# EAGLE board CT_schematic (EAGLE 7.6.0)

Size 100 x 80 mm. Coordinates in mm from the lower left corner, seen from the top.
Outline: 0,0 100,0 100,80 0,80 0,0
Copper layers (1*16): Top 0.035mm / dielectric 1.5mm / Bottom 0.035mm
Design rules "default": minimum track width 10mil, minimum drill 24mil, track to track 8mil, track to pad 8mil, pad to pad 8mil, via to via 8mil, smd to smd 8mil, copper to edge 40mil, drill to drill 8mil, minimum pad ring 10mil, minimum via ring 8mil, stop-mask expansion 4mil, vias tented up to drill 0mil, thermal gap 10mil

## Footprints (pad centres in the part's own frame; a part is rotated, then mirrored left to right if it is on the bottom)
C0603 = smd 0.8 x 0.8: 1 -0.762,0; 2 0.762,0
C0805 = smd 1.2 x 1.3: 1 -1.016,0; 2 1.016,0
C0402 = smd 0.5 x 0.5: 1 -0.508,0; 2 0.508,0
C1210 = smd 1.2 x 2.5: 1 -1.524,0; 2 1.524,0
C1206 = smd 1.3 x 1.6: 1 -1.524,0; 2 1.524,0
L0603 = smd 0.8 x 0.8: 1 -0.762,0; 2 0.762,0
R0603 = smd 0.8 x 0.8: 1 -0.762,0; 2 0.762,0
UFQFPN28 = smd 0.559 x 0.305: 1 -2.07,1.5; 7 -2.07,-1.5; 15 2.07,-1.5; 21 2.07,1.5 | smd 0.813 x 0.305: 2 -1.943,1; 3 -1.943,0.5; 4 -1.943,0; 5 -1.943,-0.5; 6 -1.943,-1; 16 1.943,-1; 17 1.943,-0.5; 18 1.943,0; 19 1.943,0.5; 20 1.943,1 | smd 0.305 x 0.559: 8 -1.5,-2.07; 14 1.5,-2.07; 22 1.5,2.07; 28 -1.5,2.07 | smd 0.305 x 0.813: 9 -1,-1.943; 10 -0.5,-1.943; 11 0,-1.943; 12 0.5,-1.943; 13 1,-1.943; 23 1,1.943; 24 0.5,1.943; 25 0,1.943; 26 -0.5,1.943; 27 -1,1.943
ATBTLC1000-MR110CA = smd 2 x 0.5: 1 -7.2,2.7; 2 -7.2,1.8; 3 -7.2,0.9; 4 -7.2,0; 5 -7.2,-0.9; 6 -7.2,-1.8; 7 -7.2,-2.7; 8 -7.2,-3.6; 17 3.6,-3.6; 18 3.6,-2.7; 19 3.6,-1.8; 20 3.6,-0.9; 21 3.6,0; 22 3.6,0.9; 23 3.6,1.8; 24 3.6,2.7 | smd 0.5 x 2: 9 -4.255,-6.824; 10 -3.355,-6.824; 11 -2.455,-6.824; 12 -1.555,-6.824; 13 -0.655,-6.824; 14 0.245,-6.824; 15 1.145,-6.824; 16 2.045,-6.824 | smd 2.7 x 2.7: 25 -1.261,-0.328
ASEK = smd 1.4 x 1: 1 -1.1,-0.8; 2 1.1,-0.8; 3 1.1,0.8; 4 -1.1,0.8
ASFL1 = smd 1.7 x 1.5: 1 -1.27,-1.1; 2 1.27,-1.1; 3 1.27,1.1; 4 -1.27,1.1
SOIC-8_EP = smd 1.6 x 0.533: 1 -2.921,1.905; 2 -2.921,0.635; 3 -2.921,-0.635; 4 -2.921,-1.905; 5 2.921,-1.905; 6 2.921,-0.635; 7 2.921,0.635; 8 2.921,1.905 | smd 2.54 x 3.302: EPAD 0,0 | drill 0.406 pad 0.406: P$1 -0.508,0.635; P$2 0.381,0.635; P$3 -0.508,-0.635; P$4 0.381,-0.635
DFN8_2X3MC = smd 0.813 x 0.305: 1 -1.398,0.75; 2 -1.398,0.25; 3 -1.398,-0.25; 4 -1.398,-0.75; 5 1.398,-0.75; 6 1.398,-0.25; 7 1.398,0.25; 8 1.398,0.75 | smd 1.753 x 1.549: 9 0,0
JST-2-SMD = smd 1 x 4.6: 1 -1,-3.7; 2 1,-3.7 | smd 1.6 x 3.4: NC1 -3.4,1.5; NC2 3.4,1.5
FCI_10118193-0001LF = smd 0.4 x 1.35: 1 -1.3,2.675; 2 -0.65,2.675; 3 0,2.675; 4 0.65,2.675; 5 1.3,2.675 | smd 1.6 x 1.4: 6 -3.2,2.45; 7 3.2,2.45 | smd 1.9 x 1.9: 8 -1.2,0; 9 1.2,0 | hole 0.5: -3.3,0; 3.3,0
SON-6 = smd 0.55 x 0.3: 1 -0.355,0.5 | smd 0.52 x 0.3: 2 -0.37,0; 3 -0.37,-0.5; 4 0.37,-0.5; 5 0.37,0; 6 0.37,0.5
SW_4-1437565-2 = smd 1.4 x 2.1: 1 -2.23,4.55; 2 -2.23,-4.55; 3 2.23,4.55; 4 2.23,-4.55
LGM67K-G1J2-24-Z = smd 0.8 x 1.4: A -2,0; C 0,0
NC7SZ125M5X = smd 1.3 x 0.7: 1 -1.3,0.95; 2 -1.3,0; 3 -1.3,-0.95; 4 1.3,-0.95; 5 1.3,0.95

## Placement (x,y rotation side)
C1  1e-07  [C0603]  -38.1,57.15 0 top  (outside the outline)
C2  1e-07  [C0603]  -41.91,57.15 0 top  (outside the outline)
C3  1e-07  [C0603]  -45.72,57.15 0 top  (outside the outline)
C4  1e-07  [C0603]  -49.53,57.15 0 top  (outside the outline)
C5  4.7e-06  [C0603]  -34.29,57.15 0 top  (outside the outline)
C6  1e-08  [C0603]  -53.34,57.15 0 top  (outside the outline)
C7  1e-06  [C0603]  -57.15,57.15 0 top  (outside the outline)
C8  1e-05  [C0805]  -21.59,52.07 0 top  (outside the outline)
C9  1e-05  [C0805]  -26.67,52.07 0 top  (outside the outline)
C10  1e-08  [C0402]  -38.1,62.23 0 top  (outside the outline)
C11  1e-08  [C0402]  -41.91,62.23 0 top  (outside the outline)
C12  1e-05  [C1210]  -57.15,36.83 0 top  (outside the outline)
C13  1e-05  [C1210]  -16.51,45.72 0 top  (outside the outline)
C14  1e-05  [C1210]  -22.86,45.72 0 top  (outside the outline)
C15  1e-05  [C1210]  -29.21,45.72 0 top  (outside the outline)
C16  1e-07  [C0402]  -45.72,62.23 0 top  (outside the outline)
C17  1e-05  [C1206]  -52.07,44.45 0 top  (outside the outline)
C18  1e-05  [C1206]  -58.42,44.45 0 top  (outside the outline)
C19  1e-08  [C0402]  -49.53,62.23 0 top  (outside the outline)
F1  240.0  [L0603]  -60.96,57.15 0 top  (outside the outline)
R1  10000.0  [R0603]  -50.8,50.8 0 top  (outside the outline)
R2  1000.0  [R0603]  -15.24,62.23 0 top  (outside the outline)
R3  1600.5  [R0603]  -19.05,62.23 0 top  (outside the outline)
R4  4700.0  [R0603]  -22.86,62.23 0 top  (outside the outline)
R5  10000.0  [R0603]  -55.88,50.8 0 top  (outside the outline)
R6  10000.0  [R0603]  -60.96,50.8 0 top  (outside the outline)
R7  10000.0  [R0603]  -15.24,57.15 0 top  (outside the outline)
R8  4031.5447154472  [R0603]  -35.56,50.8 0 top  (outside the outline)
R9  2200.0  [R0603]  -26.67,62.23 0 top  (outside the outline)
R10  10000.0  [R0603]  -20.32,57.15 0 top  (outside the outline)
R11  10000.0  [R0603]  -25.4,57.15 0 top  (outside the outline)
R12  9100.0  [R0603]  -30.48,62.23 0 top  (outside the outline)
R13  680000.0  [R0603]  -40.64,50.8 0 top  (outside the outline)
R14  120000.0  [R0603]  -45.72,50.8 0 top  (outside the outline)
R15  2000.0  [R0603]  -34.29,62.23 0 top  (outside the outline)
R16  10000.0  [R0603]  -30.48,57.15 0 top  (outside the outline)
U1  STM32L011G4U6  [UFQFPN28]  -44.45,45.72 0 top  (outside the outline)
U2  ATBTLC1000-MR110CA  [ATBTLC1000-MR110CA]  -17.78,8.89 0 top  (outside the outline)
U3  ASEK-32.768KHz-ECST  [ASEK]  -29.21,38.1 0 top  (outside the outline)
U4  ASFL1-12MHZ-NCS  [ASFL1]  -41.91,26.67 0 top  (outside the outline)
U5  MIC5234YME  [SOIC-8_EP]  -36.83,36.83 0 top  (outside the outline)
U6  MCP73831T-2ACI/MC  [DFN8_2X3MC]  -58.42,60.96 0 top  (outside the outline)
U7  S2B-PH-SM4-TB(LF)(SN)  [JST-2-SMD]  -22.86,29.21 0 top  (outside the outline)
U8  10118193-0001LF  [FCI_10118193-0001LF]  -50.8,26.67 0 top  (outside the outline)
U9  TPS3895ADRYR  [SON-6]  -52.07,60.96 0 top  (outside the outline)
U10  4-1437565-2  [SW_4-1437565-2]  -49.53,6.35 0 top  (outside the outline)
U11  Q65110A2395  [LGM67K-G1J2-24-Z]  -45.72,36.83 0 top  (outside the outline)
U12  nc7sz125m5x  [NC7SZ125M5X]  -15.24,50.8 0 top  (outside the outline)

## Library data of the parts
C1-C19 F1 R1-R16 U1-U12 = circuit_tree

## Nets
CLK_U1_2: U1.2 U3.3
CLK_U1_6: U1.6 U4.3
GND: C1.2 C2.2 C3.2 C4.2 C5.2 C6.2 C7.2 C8.2 C9.2 C10.2 C11.2 C12.2 C13.2 C14.2 C15.2 C16.2 C17.2 C18.2 C19.2 R2.2 R5.2 R9.2 R12.2 R14.2 R15.2 U1.16 U2.1 U2.9 U2.13 U2.24 U2.25 U3.2 U4.2 U5.7 U5.EPAD U6.6 U6.9 U7.2 U8.5 U8.6 U8.7 U8.8 U8.9 U9.2 U11.C U12.1 U12.3
INPUT_USBPOWER_5V: C17.1 R16.2 U6.1 U6.2 U8.1
NET_U1_1: R5.1 U1.1
NET_U1_4: R4.1 U1.4 U12.4
NET_U1_5: C6.1 C7.1 F1.1 U1.5
NET_U1_27: R3.1 U1.27 U11.A
NET_U1_28: R1.1 U1.28 U10.3 U10.4
NET_U2_17: R6.1 U2.17
NET_U2_20: R7.1 U2.20
NET_U5_4: R8.2 R9.1 U5.4
NET_U6_5: R16.1 U6.5
NET_U6_8: R15.1 U6.8
NET_U9_1: R11.1 R12.1 U9.1
NET_U9_3: R13.2 R14.1 U9.3
NET_U9_4: R10.1 U9.4 U12.2
NET_U10_1: R2.1 U10.1 U10.2
PROC_SPI1_MISO: U1.12 U2.14
PROC_SPI1_MOSI: U1.13 U2.11
PROC_SPI1_NSS: U1.10 U2.12
PROC_SPI1_SCK: U1.11 U2.10
VCC_S1_3V7: C12.1 C13.1 C18.1 U5.5 U5.8 U6.3 U6.4 U7.1
VCC_TIER1_3V3: C1.1 C2.1 C3.1 C4.1 C5.1 C8.1 C9.1 C10.1 C11.1 C14.1 C15.1 C16.1 C19.1 F1.2 R1.2 R3.2 R4.2 R6.2 R7.2 R8.1 R10.2 R11.2 R13.1 U1.17 U2.6 U2.22 U3.4 U4.4 U5.1 U9.6 U12.5

## Tracks (layer width: path | path; a pad name or v marks a point on that pad's centre or on a via)
CLK_U1_2  (1 unrouted)
CLK_U1_6  (1 unrouted)
GND  (46 unrouted)
INPUT_USBPOWER_5V  (4 unrouted)
NET_U1_1  (1 unrouted)
NET_U1_4  (2 unrouted)
NET_U1_5  (3 unrouted)
NET_U1_27  (2 unrouted)
NET_U1_28  (3 unrouted)
NET_U2_17  (1 unrouted)
NET_U2_20  (1 unrouted)
NET_U5_4  (2 unrouted)
NET_U6_5  (1 unrouted)
NET_U6_8  (1 unrouted)
NET_U9_1  (2 unrouted)
NET_U9_3  (2 unrouted)
NET_U9_4  (2 unrouted)
NET_U10_1  (2 unrouted)
PROC_SPI1_MISO  (1 unrouted)
PROC_SPI1_MOSI  (1 unrouted)
PROC_SPI1_NSS  (1 unrouted)
PROC_SPI1_SCK  (1 unrouted)
VCC_S1_3V7  (7 unrouted)
VCC_TIER1_3V3  (30 unrouted)